# Altium PCB MDBT42Q - Copy (5).PcbDoc
Units mil, origin at the board's own origin, x right, y up, seen from the top; angles counter-clockwise.
Board outline 1100 x 950 mil, 2 copper layers (Top Layer, Bottom Layer); 14 components, 12 nets, 95 pads, 0 vias.
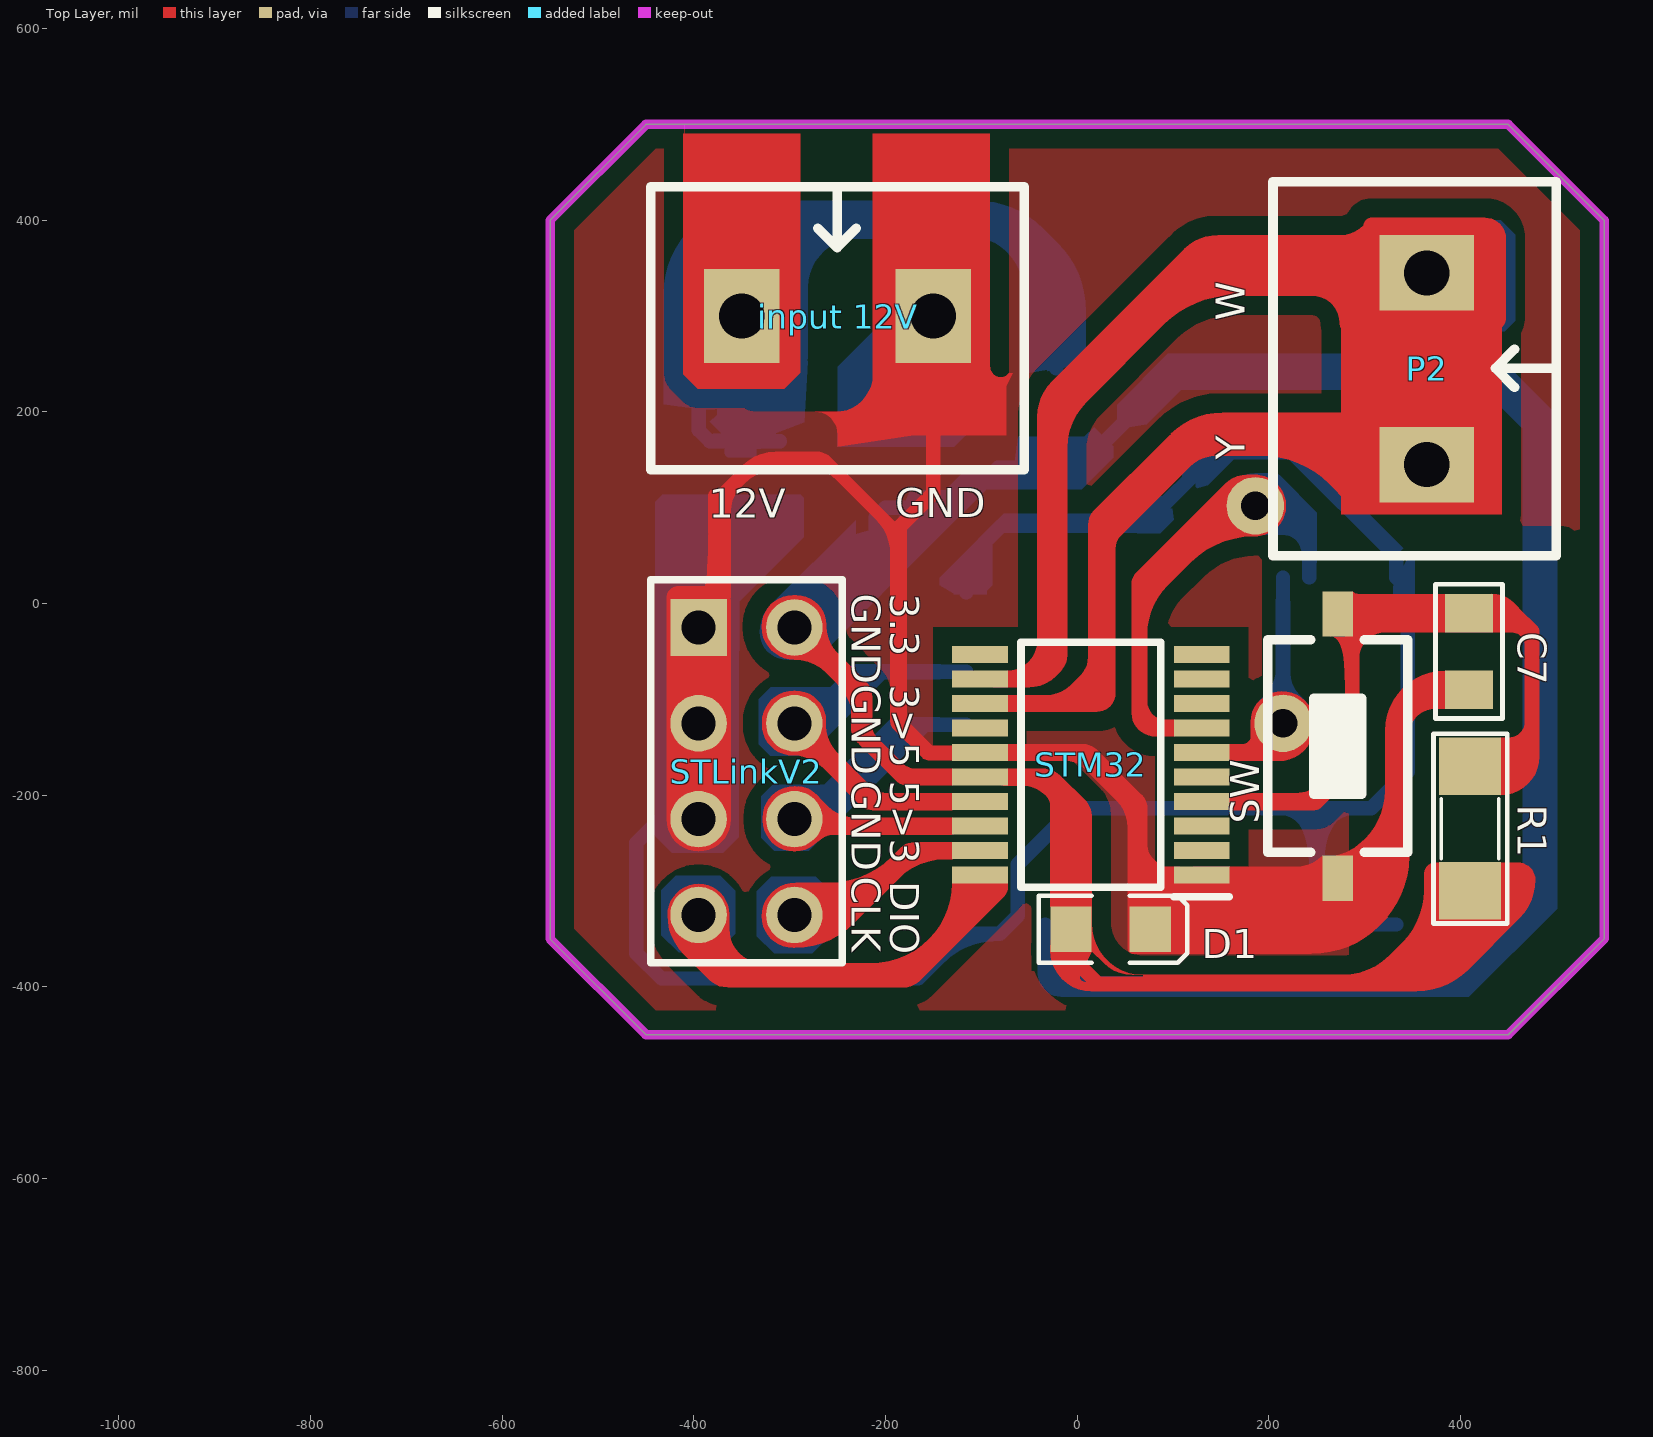
[diagram p0: Top Layer view]
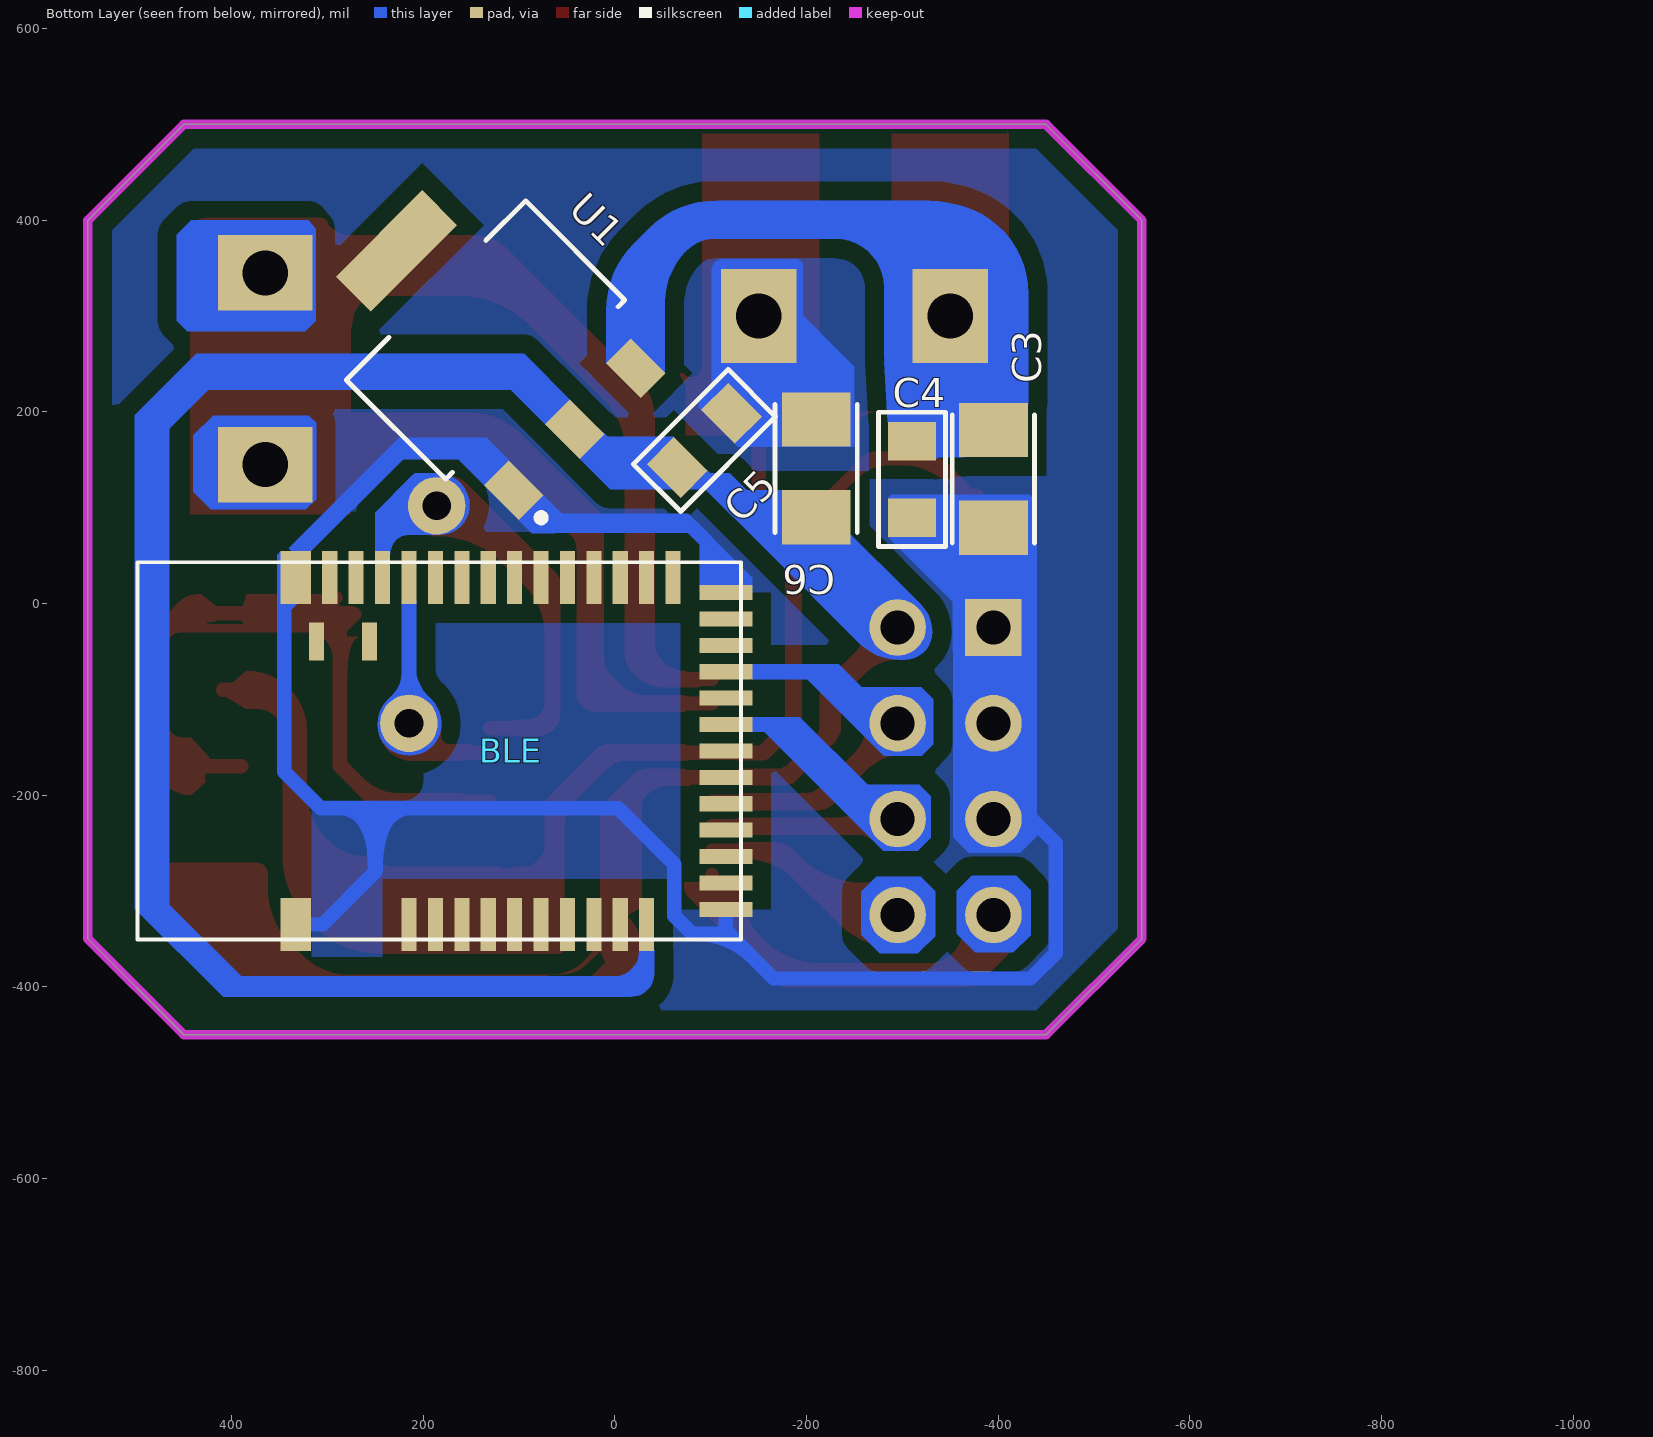
[diagram p1: Bottom Layer view, seen from below]
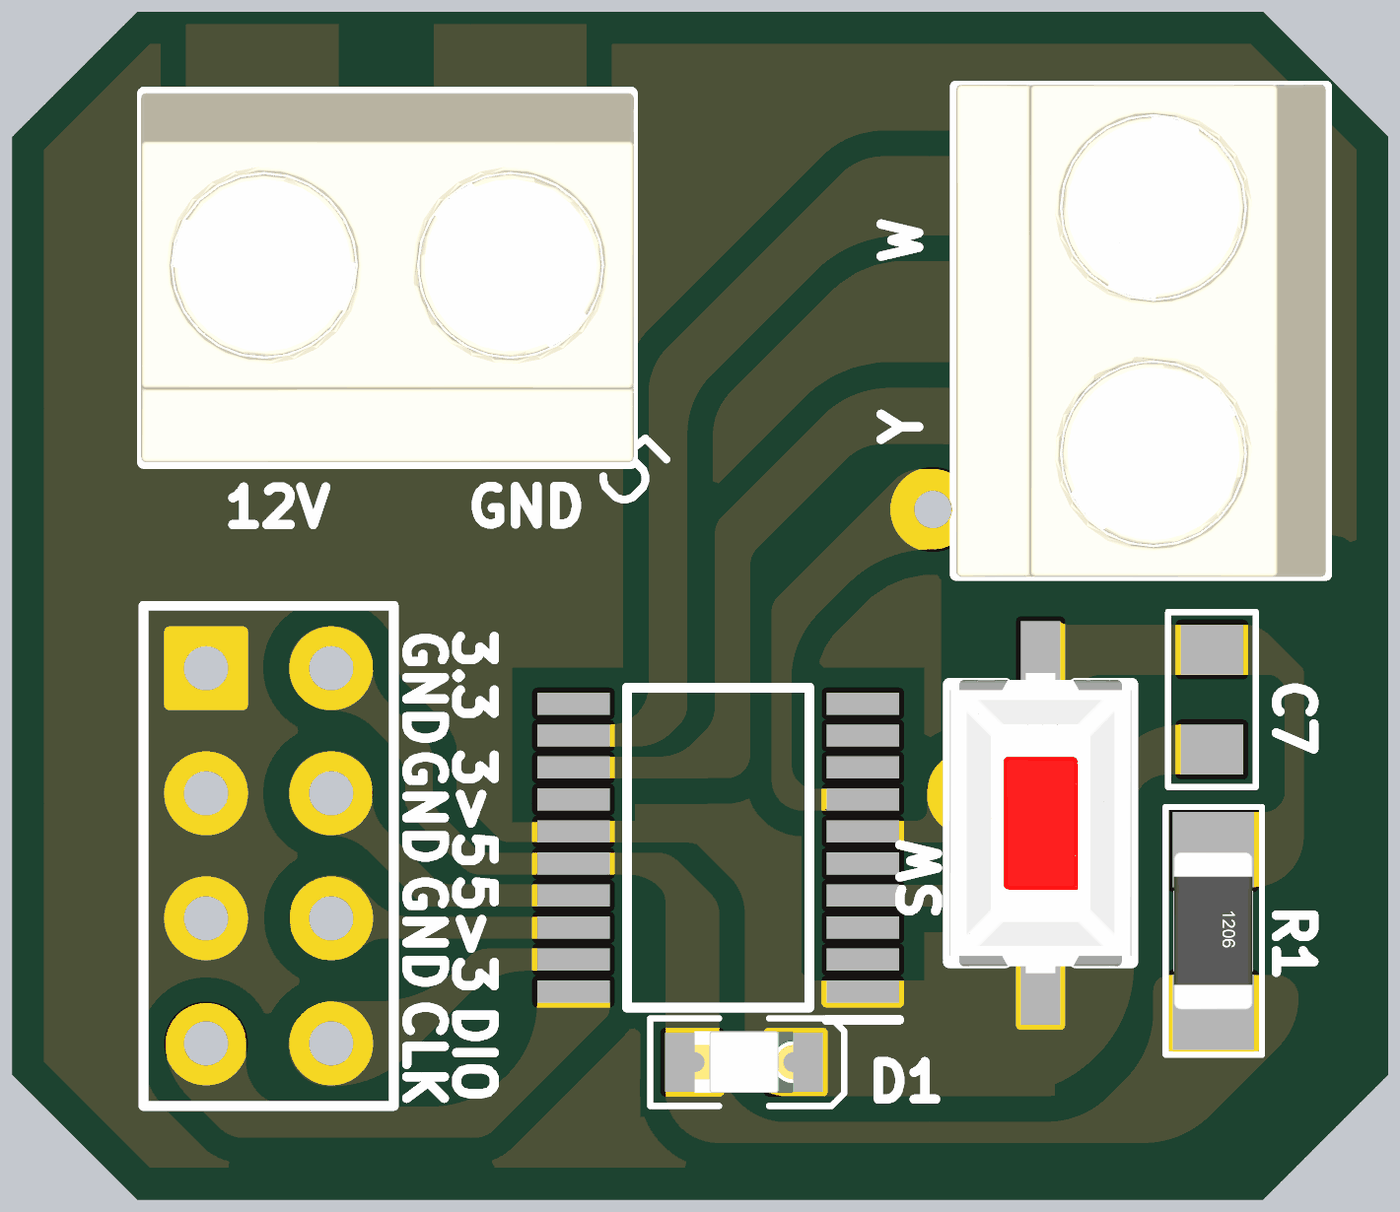
[diagram p2: 3D render of the assembled board from above, using the file's embedded part models]

## Layer stack, top to bottom
Top Solder: solder mask 0.4, Solder Resist, Dk 3.5
Top Layer: signal copper 1.4
Dielectric1: dielectric 12.6, FR-4, Dk 4.8
Bottom Layer: signal copper 1.4
Bottom Solder: solder mask 0.4, Solder Resist, Dk 3.5

## Board outline
-450,-450 -550,-350 -550,400 -450,500 450,500 550,400 550,-350 450,-450

## Design rules (kind name [scope] priority, off if disabled: settings)
Clearance [All] p1: gap=20 ignorepadtopadclearanceinfootprint=FALSE
PlaneClearance [All] p1: clearance=39.37
PlaneConnect [All] p1: planeconnectstyle=Direct reliefexpansion=20 reliefentries=4 reliefconductorwidth=10 reliefairgap=10
PolygonConnect [All] p1: connectstyle=Direct reliefconductorwidth=10 reliefentries=4 polygonreliefangle="90 Angle" airgapwidth=10
RoutingVias [All] p1: holewidth=28 width=50 viastyle="Through Hole" minholewidth=28 minwidth=50 maxholewidth=28 maxwidth=50
SolderMaskExpansion [All] p1: expansion=4
Width [All] p1: maxlimit=35 minlimit=15 preferedwidth=20 minimp=50.000000 maximp=50.000000 favimp=50.000000
28 further rules are at their usual default settings.

## Classes and differential pairs
component class MDBT42Q: C3 C4 C5 C6 C7 C8 D1 "input 12V" P2 R1 STLinkV2 SW U1

## Components (designator, comment, footprint, x,y, rotation, side; value= is the part's Value field where it differs from the comment)
BLE "MODULE_MDBT42Q" PCB_MDBT42Q_10X16 498.35,-153.9 r90 bottom
C3 "C3216X5R1A106K160AB" CAPC3216X180 -395,130 r270 bottom
C4 "2u2" 0805C-GENERIC -310,159.5 r270 bottom
C5 "2u2" 0805C-GENERIC -72.07,149.07 r135 bottom
C6 "C3216X5R1A106K160AB" CAPC3216X180 -210,140.98 r90 bottom
C7 "10u" 0805C-GENERIC 409,-20 r270 top
D1 "LED SMD" LED_0805_Blue 35,-340 r0 top
"input 12V" "Header 2 - M" "Medium - Header 2" -250,300 r0 top
P2 "Header 2 - M" "Medium - Header 2" 365,245 r270 top
R1 "RESISTOR SMD" RES-SM-1206 410,-170 r270 top
STLinkV2 "Header 4X2" HDR2X4 -395,-25 r270 top
STM32 "STM32F070F6P6" SOP65P640X120-20N 14.33,-168.39 r180 top
SW "SW-SMD" SW-SMD 272,-148.8 r270 top
U1 "AMS1117-3.3" SOT229P700X180-4N 135,275 r135 bottom

## Footprints (in the part's own frame and the unit in brackets; to place one, negate y for a bottom-side part, rotate by r counter-clockwise, add the part's x,y. Pads: shape width x height; smd on the part's side, far side on the other; paste and mask are expansions set on the pad)
0805C-GENERIC [mil] "CAPACITOR 0805"
  rect 40x50 smd: 1(-10,0) 2(70,0)
  silkscreen extent -40,-35 100,35, body extent -11,-25 70,25, height 26
CAPC3216X180 [mm]
  rect 1.44x1.82 smd: 1(-1.295,0) 2(1.295,0)
  silkscreen extent -1.7,-1.09 1.7,1.09
HDR2X4 [mm] "Connector; Header; 4x2 Position"
  rect 1.5x1.5 hole 0.9: 1(0,0)
  round 1.5 hole 0.9: 2(0,2.54) 3(2.54,0) 4(2.54,2.54) 5(5.08,0) 6(5.08,2.54) 7(7.62,0) 8(7.62,2.54)
  silkscreen extent -1.27,-1.27 8.89,3.81, body extent -1.27,-1.27 8.89,3.81, height 7
LED_0805_Blue [mm] "Chip LED, 2-Leads, Body 2.0x1.3mm, IPC Medium Density"
  rect 1.1x1.2 smd: 1(-1.05,0) 2(1.05,0)
  silkscreen extent -1.91,-0.89 2.03,0.89, body extent -1,-0.63 1,0.62, height 0.68
"Medium - Header 2" [mm]
  rect 2x2.5 hole 1.2: 1(-2.54,0) 2(2.54,0)
  silkscreen extent -4.95,-4.08 4.95,3.43, body extent -5,-4.07 5,3.43, height 10
PCB_MDBT42Q_10X16 [mm]
  rect 1.4x0.8 smd: 1(-4.6,-4.2) 39(4.6,-4.2)
  rect 1.4x0.4 smd: 2(-4.6,-7.2) 3(-4.6,-7.9) 4(-4.6,-8.6) 5(-4.6,-9.3) 6(-4.6,-10) 7(-4.6,-10.7) 8(-4.6,-11.4) 9(-4.6,-12.1) 10(-4.6,-12.8) 11(-4.6,-13.5) 25(4.6,-14.2) 26(4.6,-13.5) 27(4.6,-12.8) 28(4.6,-12.1) 29(4.6,-11.4) 30(4.6,-10.7) 31(4.6,-10) 32(4.6,-9.3) 33(4.6,-8.6) 34(4.6,-7.9) 35(4.6,-7.2) 36(4.6,-6.5) 37(4.6,-5.8) 38(4.6,-5.1)
  rect 0.4x1.4 smd: 12(-4.2,-15.6) 13(-3.5,-15.6) 14(-2.8,-15.6) 15(-2.1,-15.6) 16(-1.4,-15.6) 17(-0.7,-15.6) 18(0,-15.6) 19(0.7,-15.6) 20(1.4,-15.6) 21(2.1,-15.6) 22(2.8,-15.6) 23(3.5,-15.6) 24(4.2,-15.6)
  rect 1x0.4 smd: 40(2.9,-4.75) 41(2.9,-6.15)
  silkscreen extent -5,-16 5,0
RES-SM-1206 [mil]
  rect 60x65 smd: 1(0,0) 2(130,0)
  silkscreen extent -34,-38 164,39, body extent 2,-31 128,31, height 40
SOP65P640X120-20N [mm]
  rect 1.475x0.45 smd: 1(-2.938,2.925) 2(-2.938,2.275) 3(-2.938,1.625) 4(-2.938,0.975) 5(-2.938,0.325) 6(-2.938,-0.325) 7(-2.938,-0.975) 8(-2.938,-1.625) 9(-2.938,-2.275) 10(-2.938,-2.925) 11(2.938,-2.925) 12(2.938,-2.275) 13(2.938,-1.625) 14(2.938,-0.975) 15(2.938,-0.325) 16(2.938,0.325) 17(2.938,0.975) 18(2.938,1.625) 19(2.938,2.275) 20(2.938,2.925)
  silkscreen extent -3.68,-3.25 1.85,3.5, body extent -2.25,-3.3 2.25,3.3
SOT229P700X180-4N [mm]
  rect 0.93x1.31 smd: 1(-2.29,-3.345) 2(0,-3.345) 3(2.29,-3.345)
  rect 3.24x1.31 smd: 4(0,3.345)
  silkscreen extent -3.36,-4.47 3.36,1.86
SW-SMD [mm] "Switch SMD type"
  rect 1.2x0.8 smd: 1(-3.5,0) 2(3.5,0)
  silkscreen extent -2.82,-1.85 2.82,1.85, body extent -3.05,-1.85 3.05,1.85, height 2.5

## Part data
BLE: "MDBT42Q"
C3 C6: "C Series 1206 10 uF 10 V ±10 % Tolerance X5R SMT Multilayer Ceramic Capacitor"
C4 C5 C7: library part 0805C-2U2-6V3-X5R-PAN, "CAPACITOR 0805 CERAMIC"
D1: "LED"
"input 12V" P2: "Header, 2-Pin, Medium"
R1: "Resistor"
STLinkV2: "Header, 4-Pin, Dual row"
STM32: "STMICROELECTRONICS - STM32F070F6P6 - MCU, 32BIT, CORTEX-M0, 48MHZ, TSSOP-20"
SW: "Switch"
U1: "Sot223/Pkg 1-Amp 3.3-Volt Low Drop Out Voltage Regulatator"

## Free pads (board coordinates)
  round 60 hole 30: 2(215,-125) 3(186,102)

## Nets (pads, with @x,y where several pads share a name; then routed paths per layer and width w, separated by ;. In a path a pad name is that pad's centre, name@x,y a point inside that pad or via, vN(x,y) a via of type N, cw(c..) or ccw(c..) an arc to the next point about the centre after c; other vN are vias at no path point)
32>52: BLE.21 STLinkV2.4 STM32.17 | length 429
  Top Layer w15: STLinkV2.4 -213.23,-206.77 STM32.17
  Bottom Layer w15: STLinkV2.4 -267.18,-125 -213.41,-71.22 BLE.21
52>32: BLE.19 STLinkV2.6 STM32.18 | length 416.8
  Top Layer w15: STLinkV2.6 -287.64,-232.36 STM32.18
  Bottom Layer w15: STLinkV2.6 -265,-225 -166.34,-126.34 BLE.19
+3.3V: BLE.11 C5.1 C6.1 D1.1 R1.2 STLinkV2.2 STM32.16 U1.2 | length 3041.5
  Top Layer w15: STLinkV2.2 -228.44,-91.56 -228.44,-131.56 -178.82,-181.18 STM32.16 -38.82,-181.18 -6.34,-213.66 D1.1 -6.34,-368.66 22,-397 313,-397 R1.2
  Bottom Layer w15: STLinkV2.2 -210,60 C6.1 -200,100 -124.55,100 -82.55,142 C5.1 2,142 U1.2 100,240 430,240 480,190 480,-312.56 395.56,-397 -20,-397 -33.14,-383.86 BLE.11
+12V: "input 12V.1" C3.1 C4.1 U1.3 | length 717.3
  Bottom Layer w15: C4.1 -383.52,169.5 C3.1 -395,255 -350,300 -250,400 -80,400 -21.87,341.87 U1.3
CLK: STLinkV2.7 STM32.20 | length 406.5
  Top Layer w15: STLinkV2.7 -395,-365 -368.72,-391.28 -179.5,-391.28 -101.34,-313.12 STM32.20
DIO: STLinkV2.8 STM32.19 | length 221.4
  Top Layer w15: STLinkV2.8 -238,-325 -170.95,-257.95 STM32.19
GND: "input 12V.2" BLE.1 BLE.12 BLE.24 BLE.39 C3.2 C4.2 C5.2 C6.2 C7.2 D1.2 STLinkV2.1 STLinkV2.3 STLinkV2.5 STM32.1 STM32.15 SW.2 U1.1 | length 4240.3
  Top Layer w15: STLinkV2.5 STLinkV2.3 STLinkV2.1 -377.68,-7.68 -377.68,70 ; -377.68,75 -377.68,112.32 ; -150,300 -150,115 -185,80 -185,-125 -154.41,-155.59 STM32.15 5.59,-155.59 65.33,-215.33 65.33,-264.54 84.34,-283.54 STM32.1 ; D1.2 130,-286.34 STM32.1 ; SW.2@272,-290.32 333,-229.32 333,-122 365,-90 C7.2 ; SW.2 268.95,-283.54 STM32.1
  Bottom Layer w15: STLinkV2.5 -435,-225 -460,-250 -460,-364.97 -433.69,-391.28 -165.57,-391.28 -119,-344.71 ; STLinkV2.1 C3.2 -384.52,89.5 C4.2 ; -150,300 -210,240 C6.2 -128.17,191.97 C5.2 ; BLE.12 -115.82,-341.53 -119,-344.71 ; BLE.24 -115.82,44.18 -79,81 68.5,81 145.5,158 224,158 333,49 BLE.39 345,15.2 345,-175.57 307.02,-213.54 250,-213.54 ; BLE.1 305,-335 250,-280 250,-213.54 ; -119,-344.71 -80.71,-344.71 -62,-326 -62,-272 -3.54,-213.54 250,-213.54
MD_RESET: BLE.35 pad.2 STM32.6 | length 249.9
  Top Layer w15: STM32.6 184.41,-155.59 pad.2
  Bottom Layer w15: BLE.35 214.89,-124.89 pad.2
NetC7_1: C7.1 R1.1 STM32.4 SW.1 | length 763.7
  Top Layer w15: STM32.4 250.23,-206.77 287,-170 287,-26 SW.1 ; SW.1@275,-10 C7.1 456,-10 475,-29 475,-157 462,-170 R1.1 R1.1@390,-170
PWM_WHITE: P2.1 STM32.12 | length 793.6
  Top Layer w15: STM32.12 -48.82,-78.82 -30,-60 -30,199 116,345 P2.1
PWM_YELLOW: P2.2 STM32.13 | length 682.7
  Top Layer w15: STM32.13 -14.41,-104.41 20,-70 20,82 112,174 336,174 P2.2
SWDCLK: BLE.36 pad.3 STM32.7 | length 478.6
  Top Layer w15: STM32.7 80,-130 64.4,-114.4 64.4,19.41 147,102 pad.3
  Bottom Layer w15: pad.3 218,102 242.45,77.55 BLE.36
pads on no net: BLE.2 BLE.3 BLE.4 BLE.5 BLE.6 BLE.7 BLE.8 BLE.9 BLE.10 BLE.13 BLE.14 BLE.15 BLE.16 BLE.17 BLE.18 BLE.20 BLE.22 BLE.23 BLE.25 BLE.26 BLE.27 BLE.28 BLE.29 BLE.30 BLE.31 BLE.32 BLE.33 BLE.34 BLE.37 BLE.38 BLE.40 BLE.41 STM32.2 STM32.3 STM32.5 STM32.8 STM32.9 STM32.10 STM32.11 STM32.14 U1.4

## Polygon pours and split planes (outlines as drawn)
GND on Top Layer "NONET_L-01_P-001" (solid, pour order 13): -450,500 450,500 550,400 550,-350 450,-450 -450,-450 -550,-350 -550,400
no net on Top Layer "NONET_L-01_P-001" (solid, pour order 15): 316.03,322.5
no net on Top Layer "NONET_L01_P011" (solid, pour order 11): 390.32,692.54
GND on Top Layer "GND_L01_P001" (solid, pour order 1): -126.99,625.49
GND on Bottom Layer "NONET_L-01_P-001" (solid, pour order 17): -450,500 450,500 550,400 550,-350 450,-450 -450,-450 -550,-350 -550,400

## Keep-outs
Keep-Out Layer:
  lines w10: -550,-350 -550,400 -450,500 -350,500 450,500 550,400 550,-350 450,-450 -450,-450 -550,-350

## Other copper
Top Layer:
  rectangle net GND: -202.48,175.23 -73.49,236.21
  rectangle net PWM_WHITE: 275.19,92.69 443.24,352.58
  region net GND: -213,239 cw(c-252,239) -252,200 -273,200 cw(c-273,176.76) -249.76,176.76 -249.76,163.41 -94.35,186.9 -67.11,240.48 -70.61,240.85 -72.96,238.5 cw(c-79,244.54) -79,236 cw(c-79,248) -91,248 -91,300 ccw(c-97,300) -97,306 -114,306 cw(c-114,302) -110,302 -110,209.63 ccw(c-97.88,209.63) -97.88,197.51
  region: -304.48,370.4 -391.57,370.4 ccw(c-391.57,355.04) -406.93,355.04 ccw(c-370.12,355.04) -370.12,318.23 -326.38,318.23 ccw(c-326.38,324.88) -319.73,324.88 cw(c-308.42,324.88) -308.42,336.19 -302.55,336.19
  region: -339.75,370.4 -308.17,370.4 cw(c-308.17,351.85) -289.62,351.85 -289.62,250.09 cw(c-308.17,250.09) -308.17,231.54 -389.88,231.54 cw(c-389.88,248.58) -406.93,248.58 -406.93,351.35 cw(c-388.38,351.35) -388.38,369.9 -366.82,369.9 cw(c-366.82,332.3) -329.23,332.3 -329.23,350.85 cw(c-312.69,350.85) -312.69,367.38
  region net GND: -361.55,5.99 -361.55,97.08 cw(c-328.64,97.08) -351.91,120.35 -348.27,123.99 cw(c-298.75,74.47) -298.75,144.5 -288.86,144.5 cw(c-288.86,90.37) -250.59,128.65 -210.48,88.54 cw(c-248.53,50.5) -194.72,50.5 -194.72,-123.35 ccw(c-184.07,-123.35) -191.6,-130.88 -161.78,-160.7 ccw(c-154.43,-153.35) -154.43,-163.74 -128.12,-163.74 ccw(c-128.12,-158.4) -124.34,-162.18 ccw(c-141.01,-178.85) -141.01,-155.27 -141.98,-155.27 cw(c-141.98,-126.47) -162.35,-146.83 -180.2,-128.99 cw(c-168.61,-117.4) -185,-117.4 -185,80 -257.54,152.54 ccw(c-271.67,138.42) -271.67,158.4 -314.91,158.4 ccw(c-314.91,109.99) -349.14,144.22 -372.09,121.27 ccw(c-360.28,109.46) -376.98,109.46 -376.98,3.99 cw(c-387.01,3.99) -379.92,-3.11
  region net +3.3V: 15.41,-362.74 28.15,-375.48 ccw(c57.42,-346.22) 57.42,-387.61 277.38,-387.61 ccw(c277.38,-319.22) 325.73,-367.58 339.75,-353.56 ccw(c285.83,-299.64) 362.08,-299.64 362.08,-282.65 cw(c374.31,-282.65) 374.31,-270.43 460.24,-270.43 cw(c460.24,-288.43) 478.24,-288.43 cw(c421.71,-288.43) 461.68,-328.4 407.59,-382.5 cw(c354.29,-329.2) 354.29,-404.58 14.49,-404.58 cw(c14.49,-362.11) -27.98,-362.11 -27.98,-359.67 cw(c15.19,-359.67) 15.19,-316.5 15.19,-333.68 ccw(c69.56,-333.68) 69.56,-388.04 68.98,-388.04 cw(c68.01,-396.03) 68.01,-395.06 8.27,-395.06 cw(c8.27,-389.4) 2.61,-389.4
  region net NetC7_1: 158.92,-215.51 247.88,-215.51 ccw(c247.88,-205.81) 254.74,-212.67 251.2,-209.13 cw(c253.56,-206.77) 250.23,-206.77 156.39,-206.77 ccw(c156.39,-220.08) 146.98,-210.67
  region net NetC7_1: 158.92,-198.03 225.13,-198.03 ccw(c225.13,-145.22) 262.47,-182.56 279.07,-165.97 ccw(c270.22,-157.12) 282.73,-157.12 282.73,-168.35 ccw(c289.17,-168.35) 284.62,-172.9 254.79,-202.73 cw(c244.33,-192.28) 244.33,-207.07 156.94,-207.07 ccw(c156.94,-220.74) 147.27,-211.07
  region net NetC7_1: 384.12,-30.21 321.36,-30.21 ccw(c321.36,-57.62) 293.95,-57.62 ccw(c289.63,-57.62) 289.63,-53.29 283.26,-53.29 cw(c283.26,-50.49) 280.46,-50.49 280.46,-16.89 cw(c289.36,-16.89) 289.36,-7.99 386.61,-7.99 cw(c386.61,-12.57) 391.18,-12.57
  region net NetC7_1: 384.12,9.88 293.96,9.88 cw(c293.96,18.83) 287.63,12.5 287.35,12.22 ccw(c295.67,3.9) 283.9,3.9 ccw(c323.74,43.74) 323.74,-12.61 383.63,-12.61 ccw(c383.63,-7.27) 387.41,-11.04 389.96,-8.49
  region net NetC7_1: 433,9.99 cw(c433,-22.73) 456.14,0.4 460.87,-4.34 458.6,-6.61 ccw(c470.95,-18.96) 453.48,-18.96 420.15,-18.96 cw(c420.15,-13.18) 416.06,-17.27 ccw(c404.17,-29.17) 404.17,-12.34 403.9,-12.34
  region net NetC7_1: 441.93,-200.03 ccw(c441.93,-159.61) 482.35,-159.61 482.35,-157.85 cw(c478.18,-157.85) 478.18,-162.01 438.54,-162.01 ccw(c438.54,-172.59) 427.96,-172.59 427.96,-183.79 cw(c426.33,-183.79) 426.33,-185.43
  region net NetC7_1: 442.23,-140.01 450.45,-140.01 ccw(c450.45,-123.19) 467.27,-123.19 467.27,-43.91 ccw(c453.56,-43.91) 453.56,-30.21 384.12,-30.21 384.12,-24.21 cw(c386.58,-24.21) 386.58,-21.75 421.18,-21.75 ccw(c421.18,-13.9) 429.04,-13.9 cw(c432.94,-13.9) 432.94,-10 456,-10 cw(c456,-27.61) 473.61,-27.61 473.61,-155.61 ccw(c475,-155.61) 475,-157 cw(c464.61,-157) 464.61,-167.39 430.02,-167.39 cw(c430.02,-160.54) 423.18,-160.54
  region net +3.3V: -264.64,-33.25 -264.95,-48.45 -274.71,-48.45 cw(c-274.71,-37.3) -282.59,-45.18 -281.45,-44.04 ccw(c-291.03,-34.46) -277.48,-34.46
  region net +3.3V: -228.63,-145.24 cw(c-211.03,-127.64) -235.92,-127.64 -235.92,-115.04 cw(c-220.71,-115.04) -231.47,-104.28 -222.03,-94.85 cw(c-235.31,-108.12) -216.53,-108.12 -216.53,-133.68 cw(c-217.9,-133.68) -216.93,-134.64
  region net +3.3V: -237,-104.85 cw(c-241.28,-109.13) -235.23,-109.13 -235.23,-126.4 ccw(c-205.67,-126.4) -226.57,-147.29 -223.91,-144.63 -223.62,-144.63 -223.62,-130.74 ccw(c-232.53,-130.74) -226.23,-124.44 -221.88,-128.79 ccw(c-216.93,-123.84) -216.93,-130.84 -216.93,-129.32 ccw(c-225.81,-129.32) -219.53,-123.05 cw(c-216.46,-119.97) -220.8,-119.97 -220.8,-99.67 ccw(c-220.8,-97.84) -219.52,-99.13 -219.03,-98.65 cw(c-220.72,-96.96) -220.72,-99.35 -229.23,-99.35
  region net +3.3V: -213.87,-97.68 ccw(c-237.8,-97.68) -220.88,-80.75 -250.65,-50.98 cw(c-224,-24.34) -261.68,-24.34 ccw(c-261.68,-38.6) -271.77,-28.52 -272.24,-28.99 cw(c-306.66,-63.41) -257.98,-63.41 -257.98,-64.95 cw(c-257.98,-67.29) -256.33,-65.63 -220.43,-101.53
  region net +3.3V: -252.47,-81.63 -251.46,-82.64 cw(c-299.6,-130.78) -231.52,-130.78 cw(c-231.52,-133.2) -229.8,-131.49 -227.06,-134.24 ccw(c-232.17,-129.12) -224.94,-129.12 -224.94,-112.66 ccw(c-262.99,-112.66) -236.09,-85.75 -240.58,-81.25 ccw(c-255.58,-96.25) -255.58,-75.04
  region net SWDCLK: 188.6,70.17 184.54,70.17 ccw(c184.54,-23.17) 118.53,42.83 94.55,18.85 ccw(c146.68,-33.29) 72.95,-33.29 cw(c90.31,-15.93) 65.76,-15.93 65.76,12.51 cw(c77.03,12.51) 69.06,20.48 132.51,83.92 cw(c138.67,77.75) 138.67,86.48 177.89,86.48
  region net SWDCLK: 101.53,-138.79 81.67,-138.79 cw(c81.67,-114.16) 57.04,-114.16 cw(c59.1,-114.16) 59.1,-112.1 66.75,-112.1
  region net GND: 106.68,-274.72 92.83,-274.72 cw(c92.83,-262.42) 84.13,-271.12 78.53,-265.52 cw(c90.86,-253.19) 73.42,-253.19 73.42,-214.36 ccw(c52.58,-214.36) 67.32,-199.62 ccw(c69.25,-201.55) 66.52,-201.55 66.52,-261.1 ccw(c75.88,-261.1) 69.26,-267.72 80.74,-279.2 ccw(c91.67,-268.27) 91.67,-283.73 107.58,-283.73 ccw(c107.58,-278.83) 111.04,-282.29
  region net GND: -72.42,-146.85 6.81,-146.85 cw(c6.81,-165.54) 20.02,-152.33 65.62,-197.92 cw(c48.34,-215.19) 72.77,-215.19 72.66,-215.19 70.26,-217.59 16.12,-163.44 ccw(c-6.49,-186.06) -6.49,-154.08 -67.68,-154.08 cw(c-67.68,-138.98) -78.35,-149.66
  region net GND: -72.42,-164.33 -11.64,-164.33 cw(c-11.64,-191.9) 7.86,-172.4 41.38,-205.93 cw(c13.38,-233.92) 52.98,-233.92 52.98,-359.93 ccw(c58.64,-359.93) 58.64,-365.59 244.52,-365.59 ccw(c244.52,-265.59) 315.23,-336.3 324.23,-327.3 cw(c323.23,-326.3) 323.23,-327.72 86.04,-327.72 cw(c86.04,-295.89) 63.53,-318.4 ccw(c52.88,-307.75) 67.94,-307.75 67.94,-228.12 ccw(c51.94,-228.12) 63.26,-216.8 3.38,-156.93 ccw(c0.16,-160.15) 0.16,-155.59 -85.99,-155.59
  region net GND: 54.64,-316.38 54.64,-232.68 ccw(c13.81,-232.68) 42.68,-203.81 10.69,-171.82 ccw(c-9.57,-192.08) -9.57,-163.43 -76.64,-163.43 cw(c-76.64,-143.43) -90.78,-157.57 cw(c-85.99,-162.36) -85.99,-155.59 5.59,-155.59 cw(c5.59,-157) 6.59,-156 60.25,-209.66 cw(c49.09,-220.82) 64.87,-220.82 64.87,-259.75 ccw(c75.32,-259.75) 67.93,-267.14 84.34,-283.54 ccw(c86.41,-281.47) 86.41,-284.4 120.5,-284.4 120.5,-291.72 cw(c101.72,-291.72) 115,-305 105.17,-314.83 cw(c88.61,-298.27) 88.61,-321.69 68.73,-321.69 ccw(c68.73,-334.35) 59.78,-325.4
  region net +3.3V: -130.26,-172.44 -169.04,-172.44 cw(c-169.04,-155.11) -181.29,-167.37 -208.91,-139.75 cw(c-196.95,-127.79) -213.87,-127.79 -213.87,-98.91 ccw(c-226.39,-98.91) -217.53,-90.06 -249.06,-58.53 cw(c-218.57,-28.05) -261.68,-28.05 -266.57,-28.05 ccw(c-266.57,-30.13) -268.04,-28.66 cw(c-270.39,-31.01) -267.07,-31.01 -267.07,-48.44 ccw(c-258.98,-48.44) -264.7,-54.16 -223.22,-95.63 cw(c-230.06,-102.47) -220.39,-102.47 -220.39,-134.12 ccw(c-216.85,-134.12) -219.35,-136.62 -179.23,-176.74 ccw(c-177.82,-175.33) -177.82,-177.33 -115.68,-177.33
  region net +3.3V: -130.26,-189.92 -176.44,-189.92 cw(c-176.44,-171.8) -189.25,-184.61 -225.06,-148.8 cw(c-209.73,-133.47) -231.41,-133.47 -231.41,-113.67 ccw(c-258.65,-113.67) -239.39,-94.41 -261.06,-72.75 ccw(c-295.22,-106.91) -295.22,-58.59 cw(c-295.22,-24.84) -328.98,-24.84 -328.98,-23.61 cw(c-296.87,-23.61) -296.87,8.5 -292.57,8.5 cw(c-292.57,-22.39) -261.68,-22.39 -261.68,-26.28 cw(c-279.48,-26.28) -279.48,-44.08 -282.75,-44.08 -223.22,-95.63 -220.77,-135.32 -178.82,-181.18 -133.82,-179.71
  region net 32>52: -130.26,-197.89 -198.13,-197.89 cw(c-198.13,-174.67) -214.55,-191.09 -251.19,-154.45 cw(c-224.8,-128.06) -262.13,-128.06 -270.71,-128.06 cw(c-270.71,-117.23) -278.38,-124.89 -278.19,-125.07 -278.19,-149.28 -248.43,-179.04 ccw(c-177.72,-108.33) -177.72,-208.33 -124.69,-208.33
  region net 32>52: -130.28,-215.55 -213.91,-215.55 cw(c-213.91,-198.21) -226.18,-210.47 -265.06,-171.59 ccw(c-296.59,-203.11) -296.59,-158.53 cw(c-296.59,-126.37) -328.75,-126.37 -328.75,-123.9 cw(c-295.77,-123.9) -295.77,-90.92 -293.95,-90.92 cw(c-293.95,-122.74) -262.13,-122.74 -262.13,-126.37 cw(c-279.1,-126.37) -279.1,-143.35 cw(c-279.1,-160.49) -261.96,-160.49 -261.96,-160.84 -222.05,-205.51 -115.82,-209.02
  region net GND: -395.38,-258.49 -394.78,-258.49 ccw(c-394.78,-225.26) -361.55,-225.26 -361.55,2.99 ccw(c-376.63,2.99) -376.63,18.07 -415.96,18.07 ccw(c-415.96,5.74) -428.29,5.74 -428.29,-225.32 ccw(c-395.12,-225.32) -395.12,-258.48
  region net 52>32: -130.26,-223.62 -230.83,-223.62 cw(c-230.83,-181.54) -260.58,-211.3 -274.24,-197.64 ccw(c-290.48,-213.88) -290.48,-190.91 -290.48,-204.45 ccw(c-284.45,-204.45) -288.72,-208.72 -266.82,-230.61 -266.82,-231.13 -116.77,-231.13 ccw(c-116.77,-220.96) -109.57,-228.15
  region net 52>32: -130.26,-241.1 -251.87,-241.1 ccw(c-251.87,-268.94) -271.55,-249.25 cw(c-293.55,-227.26) -293.55,-258.37 -296.09,-258.37 cw(c-296.09,-226.49) -327.97,-226.49 -327.97,-223.45 cw(c-295.21,-223.45) -295.21,-190.69 -294.34,-190.69 cw(c-294.34,-224.1) -260.93,-224.1 -260.93,-227.12 ccw(c-256.15,-227.12) -256.15,-231.9 -106.25,-231.9
  region net DIO: -129.83,-266.92 -137.95,-266.92 ccw(c-137.95,-335.95) -186.76,-287.14 -197.64,-276.26 ccw(c-197.64,-252.66) -181.33,-268.97 -168.58,-256.22 ccw(c-164.76,-252.4) -164.76,-257.8 -126.91,-257.8
  region net DIO: -130.26,-249.21 -169.93,-249.21 ccw(c-169.93,-269.49) -184.26,-255.15 -193.85,-264.74 cw(c-257.83,-200.76) -257.83,-291.24 -293.69,-291.24 ccw(c-293.69,-326.63) -329.08,-326.63 ccw(c-296.46,-326.63) -296.46,-359.25 -294.51,-359.25 ccw(c-294.51,-272.37) -233.07,-333.8 -177.92,-278.66 cw(c-137.49,-319.09) -137.49,-261.91 ccw(c-130.26,-258.83) -124.7,-264.39 -115.56,-255.25
  region net CLK: -130.37,-292.09 cw(c-212.39,-292.1) -154.4,-350.1 cw(c-215.95,-288.56) -215.95,-375.6 -327.05,-375.6 cw(c-327.05,-339.57) -363.08,-339.57 -363.08,-324.35 ccw(c-394.8,-324.35) -394.8,-292.63 ccw(c-394.8,-325.18) -427.35,-325.18 ccw(c-369.23,-325.19) -410.33,-366.28 -384.11,-392.51 ccw(c-364.78,-373.17) -364.78,-400.51 -180.73,-400.51 ccw(c-180.73,-377.31) -164.32,-393.72 -76.09,-305.49 ccw(c-85.19,-296.34) -72.28,-296.34 -72.28,-292.36 ccw(c-74.5,-292.36) -72.93,-290.79 -73.31,-290.42
  region net +3.3V: -27.87,-316.5 -27.87,-211.52 ccw(c-43.67,-211.52) -32.5,-200.35 ccw(c-57.54,-225.39) -57.54,-189.98 -58.28,-189.98 cw(c-56.74,-189.98) -57.83,-188.89 -52.62,-183.69 ccw(c-36.28,-167.34) -36.28,-190.46 -31.02,-190.46 cw(c-31.02,-201.72) -23.05,-193.76 -16.21,-200.6 cw(c-25.59,-209.97) -12.33,-209.97 -12.33,-326.14
  region net +3.3V: 15.19,-316.5 15.19,-221.18 ccw(c-6.29,-221.18) 8.9,-205.99 -17.57,-179.52 ccw(c-34.65,-196.6) -34.65,-172.44 cw(c-41.91,-172.44) -36.78,-177.58 -39.93,-180.74 -20.1,-200.58 cw(c-21.41,-201.89) -19.55,-201.89 -19.55,-292.42 ccw(c32.96,-292.42) -4.17,-329.56
  region net +3.3V: -72.42,-172.44 -35.58,-172.44 cw(c-35.58,-191.28) -22.26,-177.96 8.12,-208.34 cw(c-1.23,-217.68) 11.99,-217.68 11.99,-333.04 cw(c-3.45,-333.04) 7.47,-343.96 -20.21,-316.28 cw(c-15.28,-311.35) -22.26,-311.35 -22.26,-214.94 ccw(c-60.85,-214.94) -33.56,-187.65 cw(c-39.18,-182.04) -39.18,-189.98 -77.38,-189.98 cw(c-77.38,-187.21) -79.34,-189.17 -83.11,-185.39
  region net GND: 256.37,-263.09 cw(c228.33,-235.04) 228.33,-274.71 143.95,-274.71 ccw(c143.95,-280.31) 139.99,-276.35 76.34,-340 96.44,-360.1 cw(c92.99,-363.56) 97.87,-363.56 246.56,-363.56 ccw(c246.56,-263.56) 346.56,-263.56 346.56,-224.23 ccw(c321.38,-224.23) 321.38,-199.05 321.38,-199.09 cw(c256.15,-199.09) 256.15,-264.32
  region net GND: 385.14,-110 373.11,-110 ccw(c373.11,-136.55) 346.56,-136.55 346.56,-251.56 cw(c287.77,-251.56) 287.77,-310.35 278.08,-310.35 cw(c278.08,-308.23) 275.95,-308.22 275.95,-288.18 cw(c285.64,-288.18) 278.79,-281.33 ccw(c228.97,-184.44) 325.86,-134.63 334.78,-117.41 365,-90 408.71,-95.71
  region net GND: 384.41,-70.05 ccw(c384.41,-132.9) 321.55,-132.9 321.55,-195.6 cw(c251.08,-195.6) 300.91,-245.42 cw(c230.26,-174.78) 230.26,-274.69 121.14,-274.69 ccw(c125.66,-294.98) 139.61,-279.56 268.76,-279.56 ccw(c268.76,-240.97) 296.05,-268.26 330.01,-234.3 334.37,-117.41 346.85,-104.93 370.91,-91.25 403.29,-91.03 402.89,-85.85
  region net NetC7_1: 434.01,-11.08 437.88,-19.74 ccw(c440.22,-22.08) 437.88,-24.43 433.89,-24.43 ccw(c433.89,-26.7) 431.61,-26.7 431.61,-24.15 ccw(c427.95,-24.15) 427.95,-20.49 ccw(c428.13,-15.41) 433.21,-15.6
  region net MD_RESET: 158.92,-164.33 210.42,-164.33 ccw(c210.42,-127.11) 247.63,-127.11 247.63,-125.36 ccw(c213.7,-125.36) 213.7,-91.43 ccw(c213.7,-123.65) 181.48,-123.65 181.48,-137.82 cw(c172.37,-137.82) 172.37,-146.94 151.68,-146.94 ccw(c151.68,-153.58) 145.04,-153.58 ccw(c149.53,-153.58) 149.53,-158.07 149.96,-158.07
  region net SWDCLK: 188.78,134.42 177.28,134.42 ccw(c177.28,102.15) 154.47,124.97 62.32,32.82 ccw(c75.36,19.77) 56.91,19.77 57.41,19.77 59.45,17.72 63.17,21.44 cw(c77.09,7.51) 77.09,27.2 160.33,95.58 177.49,88.76 196.98,106.5
  region net SWDCLK: 101.34,-121.31 91.95,-121.31 cw(c91.95,-102.48) 73.13,-102.48 73.13,-1.13 cw(c104.41,-1.13) 82.29,20.98 125.78,64.47 cw(c139.49,50.76) 139.49,70.15 186.15,70.15 ccw(c186.15,102) 218,102 ccw(c185.58,102) 185.58,134.42 185.01,134.42 ccw(c185.01,102.28) 152.88,102.28 152.88,97.68 cw(c126.1,97.68) 126.1,70.89 64.4,19.41 61.11,-92.45 72.07,-125.3 105.66,-131.4 119.78,-126.29
  region net PWM_YELLOW: 425.69,180.52 425.69,187.19 ccw(c413.62,187.19) 413.62,199.26 151.7,199.26 ccw(c151.7,123.02) 97.79,176.93 102.54,172.18 cw(c98.05,167.69) 104.4,167.69 264.04,167.69 cw(c264.04,134.88) 287.23,158.08 cw(c313.11,132.2) 313.11,168.8 394.17,168.8
  region net PWM_YELLOW: 313.31,185.5 419.47,185.5 cw(c419.47,179.28) 425.69,179.28 425.69,105.31 cw(c417.19,105.31) 417.19,96.81 304.04,96.81 cw(c304.04,127.88) 282.07,105.91 ccw(c263.95,124.03) 289.57,124.03 289.57,137.77 313.67,137.77 ccw(c313.67,164.38) 332.49,145.57 ccw(c314.67,127.75) 314.67,152.95 282.2,152.95
  region net PWM_YELLOW: 314.86,105.91 282.07,105.91 263.03,124.96 ccw(c192.32,54.25) 192.32,154.25 145.59,154.25 ccw(c145.59,113.94) 117.09,142.44 45.51,70.87 ccw(c58.95,57.43) 39.95,57.43 39.95,-94.01 cw(c21.06,-94.01) 21.06,-112.9 -6.16,-112.9 cw(c-6.16,-109.27) -9.79,-109.27 22.64,-69.97 20,82 123.37,167.15 287.13,165.9 305.05,126.38
  region net PWM_YELLOW: 1.96,-113.15 ccw(c1.96,-81.31) 33.8,-81.31 33.8,-69.23 cw(c33.06,-69.23) 33.06,-69.97 24.25,-69.97 ccw(c24.25,-86.16) 8.06,-86.16 8.06,-94.51
  region net PWM_WHITE: -50.71,-87.6 ccw(c-50.71,-47.52) -22.37,-75.86 -17.05,-70.54 ccw(c-33.42,-54.17) -10.27,-54.17 -10.27,162.6 cw(c56.81,162.6) 9.38,210.03 91.23,291.88 cw(c161.94,221.17) 161.94,321.17 245.74,321.17 cw(c245.74,292.96) 273.96,292.96 ccw(c284.94,292.96) 284.94,281.97 429.8,281.97 ccw(c429.8,299.66) 447.49,299.66 447.49,380.93 ccw(c425.98,380.93) 425.98,402.44 306.95,402.44 ccw(c306.95,394.79) 299.3,394.79 cw(c272.76,421.33) 272.76,383.8 212.89,383.8 ccw(c212.89,311.98) 162.11,362.76 156.17,356.82 cw(c90.88,422.1) 90.88,329.78 cw(c77.03,329.78) 86.83,319.98 -18.59,214.57 ccw(c18.37,177.62) -33.89,177.62 -33.89,-46.92 cw(c-65.05,-46.92) -43.02,-68.95 -47.74,-73.67
  region net PWM_YELLOW: -72.42,-113.15 1.96,-113.15 ccw(c1.96,-92.84) 16.32,-107.2 19.97,-103.55 ccw(c-13.41,-70.17) 33.8,-70.17 33.8,-70.51 cw(c-29.9,-30.14) -29.9,-103.73 -84.22,-103.73 ccw(c-84.22,-106.43) -86.13,-104.52
  region net PWM_YELLOW: -72.42,-95.67 -32.46,-95.67 ccw(c-32.46,-58.28) -6.02,-84.72 3.64,-75.06 ccw(c-15.88,-55.54) 11.72,-55.54 11.72,82.74 cw(c31.34,82.74) 17.47,96.61 95.12,174.26 cw(c122.25,147.12) 122.25,185.5 312.89,185.5 cw(c312.89,181.24) 315.91,184.25 cw(c299.37,167.72) 322.76,167.72 322.76,144.64 cw(c305.11,144.64) 317.59,132.16 cw(c292.14,106.71) 328.13,106.71 328.13,105.91 318.27,105.91 cw(c318.27,140.49) 293.82,116.04 280.74,129.12 ccw(c210.03,58.41) 210.03,158.41 143.62,158.41 ccw(c143.62,104.81) 105.72,142.71 43.61,80.6 ccw(c67.28,56.93) 33.8,56.93 33.8,-68.29 cw(c14.75,-68.29) 28.22,-81.76 18.44,-91.54 cw(c-10.85,-62.26) -10.85,-103.67 -89.77,-103.67 ccw(c-89.77,-105.76) -91.24,-104.28
  region net PWM_WHITE: 213.97,337.92 163.72,337.92 ccw(c163.72,237.92) 93.01,308.63 90.05,305.67 cw(c93.32,308.94) 88.7,308.94 88.7,315.55 cw(c116.1,315.55) 96.72,334.93 115.94,354.15
  region net PWM_WHITE: 316.06,305.81 313.68,308.2 ccw(c242.97,237.49) 242.97,337.49 211.05,337.49 ccw(c211.05,347.54) 218.16,340.43 232.2,354.47 286.97,354.47 cw(c286.97,307.97) 319.85,340.85 cw(c299.71,320.71) 328.19,320.71 328.19,315.38
  region net PWM_WHITE: 316.06,384.45 146.69,384.45 ccw(c146.69,335.46) 112.05,370.1 130.2,351.96 cw(c125.18,346.94) 132.28,346.94 318.85,346.94 cw(c318.85,331.66) 329.65,342.47
  region net PWM_WHITE: -72.42,-70.08 ccw(c-72.42,-39.03) -41.37,-39.03 -41.37,194.8 cw(c11.47,194.8) -25.89,232.16 108.15,366.2 cw(c147.77,326.58) 147.77,382.61 147.77,379.44 cw(c109.03,379.44) 136.42,352.04 -6.42,209.2 ccw(c18.4,184.38) -16.7,184.38 -16.7,-48.06 cw(c-44.69,-48.06) -24.9,-67.85 -39.03,-81.98 cw(c-52.6,-68.4) -52.6,-87.6 -83.31,-87.6 cw(c-83.31,-65.14) -99.19,-81.02
  region net +12V: -102,366
  region net +12V: -102,366
  region net +12V: -107,372
  region net +12V: -289,500
  region net GND: -213,344.74 -213,239 -198,224 -107.85,224 -91,240.85 -91,490 -213,490
  region net +12V: -411,344.74 -411,239 -396,224 -305.85,224 -289,240.85 -289,490 -411,490
  region net +12V: -410,356.73 -410,500
  region: -361.67,18.97
  region net NetC7_1: 287.63,12.5
  region net +3.3V: -217.15,-99.6
  region: 54.64,-316.38
  region net SWDCLK: 169.79,130.76
  region: 176.69,133.7
  region net SWDCLK: 157.07,75.08 124.08,68.59 119.21,76.98 149.77,102.67 163.56,94.83
  region net NetC7_1: 158.92,-198.03
  region net PWM_YELLOW: 140.99,158.28
  region: 5.16,-113.25
  region net PWM_WHITE: -52.72,-63.03
  region net +3.3V: -93.13,513.47
  region net +3.3V: -89.11,516.15
  region: -1032.3,-185.32
  region: 334.81,303.04
  region: 43.46,540.44
  region net +3.3V: -285.49,484.84
  region: -285.53,459.46
  region: 507.27,50.34
Bottom Layer:
  region net +3.3V: -153.03,60.64 -255.56,-41.89 cw(c-295.93,-1.53) -295.93,-58.61 -302.44,-58.61 cw(c-302.44,-29.84) -331.21,-29.84 cw(c-290.65,-29.84) -319.33,-1.16 -269.64,48.54 cw(c-198.93,-22.17) -198.93,77.83 -144.52,77.83
  region net SWDCLK: 234.55,51.69 ccw(c214.52,51.69) 214.52,71.73 213.95,71.73 cw(c219.48,71.73) 219.48,77.25 231.78,77.25 cw(c231.78,66.5) 242.52,66.5 242.52,50.38 cw(c238.42,50.38) 238.42,46.28
  region net SWDCLK: 234.69,54.64 ccw(c217.61,54.64) 217.61,71.72 182.53,71.72 cw(c182.53,102.45) 151.8,102.45 cw(c185.38,102.45) 185.38,136.02 209.09,136.02 213.04,132.07
  region net SWDCLK: 234.72,54.76 234.72,57.91 ccw(c203.4,57.91) 225.54,80.06 224.77,80.84 193.59,80.84 193.59,121.44 200.36,128.22 212.17,128.22 249.94,90.45 249.94,42.44 248.36,40.86 239.39,49.82 239.39,84.62
  region net +3.3V: 72.89,187.17 108.82,223.1 424.59,223.1 465.2,182.5 465.2,-314.15 390.18,-389.16 1.07,-389.16 cw(c1.07,-362.65) -25.44,-362.65 ccw(c-31.16,-362.65) -31.16,-356.93 -35.39,-356.93 ccw(c-35.39,-362.44) -40.9,-362.44 -40.9,-386.27 ccw(c-16.84,-386.27) -16.84,-410.32 408.94,-410.32 500.96,-318.3 500.96,196.24 436.77,260.44 94.72,260.44 41.88,207.6 41.88,181.88
  region net GND: -176.85,163.85 -128.19,163.85 -87.59,204.45 -87.59,213.76 -101.23,227.41 -101.23,348.29 ccw(c-112.12,348.29) -112.12,359.18 -189.19,359.18 ccw(c-189.19,352.27) -196.1,352.27 -196.1,300.89 -249.76,247.22 -249.76,163.41
  region net +12V: -52.11,240.56 -52.11,314.43 ccw(c-128.12,314.43) -74.38,368.18 ccw(c-104.16,338.39) -104.16,380.51 -230.57,380.51 ccw(c-230.57,329.94) -281.14,329.94 -281.14,263.43 cw(c-300.7,263.43) -300.7,243.87 -320.87,243.87 cw(c-320.87,271.26) -348.25,271.26 -348.25,379 cw(c-339.23,379) -339.23,388.02 cw(c-328.99,388.02) -328.99,398.26 -72.88,398.26 cw(c-72.88,347.25) -21.87,347.25 -21.87,245.63
  region net +12V: -334.88,149.62 ccw(c-337.74,149.62) -337.74,152.48 -362.89,152.48 cw(c-362.89,157.1) -367.52,157.1 -367.52,174.83 cw(c-363.13,174.83) -363.13,179.21 -344.66,179.21 cw(c-344.66,169.86) -335.3,169.86
  region net +12V: -431.21,208.17 -431.21,323.34 cw(c-335.71,323.34) -335.71,418.84 cw(c-335.71,401.36) -318.23,401.36 -318.23,262.79 cw(c-378.16,262.79) -378.16,202.86 -394.39,202.86
  region net +12V: 9.14,250.96 9.14,305.31 ccw(c-90.86,305.31) -20.15,376.02 -35.34,391.2 ccw(c-106.05,320.49) -106.05,420.49 -329.11,420.49 ccw(c-329.11,342.06) -407.54,342.06 -407.54,308.9 ccw(c-398.93,308.9) -398.93,300.28 -342.95,320.86 -333.88,389.62 -352.82,344.74 -312.06,344.75 -261.84,380.97 -222.74,391.67 -133.41,391.67 -65.07,376.43 -31.29,320.05 -31.29,242.25
  region net +12V: -304.32,365.16 -386.21,365.16 ccw(c-383.98,341.05) -408.09,338.82 -408.09,317.58 ccw(c-397.78,319.22) -396.13,308.91
  region net +12V: -349.06,365.16 -304.32,365.16 cw(c-304.32,341.91) -281.07,341.91 -281.07,257.12 cw(c-303.61,257.12) -303.61,234.58 -388.05,234.58 cw(c-388.05,254.61) -408.09,254.61 -408.09,336.55 cw(c-379.82,336.55) -379.82,364.81
  region: 222.72,2.27 222.72,-72.81 ccw(c254.93,-72.81) 232.15,-95.59 237.03,-100.46 cw(c211.42,-126.07) 247.63,-126.07 247.63,-127.11 cw(c216.38,-127.11) 216.38,-158.37 213.04,-158.37 cw(c213.04,-126.82) 181.48,-126.82 181.48,-124.38 cw(c216.22,-124.38) 191.66,-99.82 195.89,-95.59 ccw(c167.67,-67.36) 207.59,-67.36 207.59,3.72 cw(c219.46,3.72) 211.07,12.12
  region: 319.32,196.03 419.45,196.03 439.98,175.51 439.98,116.75 421.55,98.32 322.46,98.32 311.92,108.85 311.92,188.54
  region: 319.98,399.97 442.27,399.97 457.26,384.97 457.26,294.93 446.52,284.18 323.07,284.18 312.31,294.93 312.31,390.86 312.31,390.87
  region net DIO: -294.08,-285.05 -272.51,-285.05 -256.86,-300.7 -256.86,-345.45 -276.57,-365.16 -316,-365.16 -334.14,-347.02 -334.14,-300.1 -319.09,-285.05 -294.04,-285.05
  region: -393.78,-284.05 -372.21,-284.05 -356.55,-299.71 -356.55,-344.45 -376.27,-364.17 -415.7,-364.17 -433.84,-346.03 -433.84,-299.1 -418.79,-284.05 -393.74,-284.05
  region net +3.3V: -174.34,118.37 -137.51,118.37 -119.8,136.08 -77.79,136.08 -71,129.29 -75.32,124.96 -100.03,124.96 -161.81,63.19 -165.82,67.2 -196.09,67.2
  region net +3.3V: -153.03,60.64 -94.45,119.22 -59.18,119.22 -59.18,128.08 -56.7,130.57 -64.45,138.33 -96.79,138.32 -164.21,70.9
  region net +3.3V: -61.41,173.77 7.73,173.77 17.97,184.02 37.79,164.2 37.79,151.99 5.06,119.26 -69.77,119.26 -69.77,142.61 -65.28,147.09
  region net 32>52: -142.6,-78.99 -200.88,-78.99 -280.6,-158.71 -320.14,-158.71 -332.04,-146.81 -332.04,-99.78 -319.88,-87.62 -257.75,-87.62 -233.47,-63.33 -142.22,-63.33
  region net 52>32: -144.18,-134 -155.79,-134 -279.95,-258.17 -315.86,-258.17 -329.66,-244.37 -329.66,-201.17 -317.65,-189.17 -263.65,-189.17 -193.07,-118.59 -143.26,-118.59 -143.26,-126.11 -145.16,-128.01
  region net 52>32: -146.37,-132.71
  region net GND: 348.75,54.76 352.62,50.89 352.62,0.62 341.64,-10.36 330.13,1.16 330.13,18.1
  region net GND: 110.54,149.09 134.34,172.9 224.93,172.9 340.33,57.51 333,50.18 333,49 222.89,159.11 141.22,159.11 109.9,127.79
  region net GND: 136.46,123.31 169.9,156.75 142.01,156.75 141.9,156.86 123.78,138.74 123.78,121.8 125.17,120.41
  region net GND: 100.63,87.39 86.74,73.5 62.63,73.5 62.63,74.89 60,77.51 81.49,99 99.53,99
  region net GND: 74.71,113.07 55.25,93.62 -76.41,93.62 -115.15,54.87 -105.13,54.87 -79,81 -78.18,80.18 66.98,80.18 98.01,111.21
  region net GND: -88.52,19.24 -88.52,68.64 -109.29,47.87 -117.58,47.87 -117.58,30.57 -104.57,17.56
  region net GND: -143.45,19.14 -143.45,26.86 -118.87,51.44 -98,51.44 -98,28.72 -88.52,19.24 -94.42,13.34 -94.42,9.7 -128.44,9.7 -129.3,10.56
  region net SWDCLK: 235.55,51.81
  region net SWDCLK: 250.2,54.64 250.2,94.91 213.04,132.07 186.13,132.07 186.13,127.81 173.67,115.35 186.03,102.99 186.03,72.16 233.91,72.16 234.95,73.2
  region: -88.52,19.24
  region: -174.86,-98.68
  region: -174.86,-98.68
  region net GND: -352.87,-50.22 -352.87,-244.13 -369.07,-260.33 -422.86,-260.33 -440.08,-243.1 -440.08,-47.14 -416.71,-23.77 -409.96,-23.77
  region net GND: -352.59,-49.48
  region net GND: -292.76,113.39 -432.94,113.39 -440.08,106.24 -440.08,-47.14 -428.74,-58.49 -361.6,-58.49 -352.59,-49.48 -352.59,1.81 -285.14,69.26 -285.14,110.23 -288.28,113.37
  region net +3.3V: -268.82,-48.32 -156.6,63.91 -156.6,85.56 -208.17,85.56 -300.36,-6.62 -300.36,-38.6
  region net +3.3V: -319.1,-0.92 -231.05,87.12 -231.05,40.04 -284.25,-13.15 -311.78,-13.15 -312.95,-11.98
  region net +3.3V: -302.89,7.74
  region: -158.23,561.05
  region: -280.84,251.09
  region net +12V: -284.98,189.15 -281.07,252.63 -314.46,252.63 -346.64,220.45 -375.58,220.45 -375.58,197.24 -383.22,189.61 -358.78,165.17 -347.18,165.17
  region net +3.3V: 346.57,-314
  region: -301.58,-802.62
  region net 32>52: -297.04,-698.69

## Silkscreen, mask and mechanical layers (free items; w line width, h text height)
Top Overlay:
  text "W" at 175,295 h30 r90
  text "Y" at 175,150 h30 r90
  text "12V" at -384.52,89.5 h30
  text "GND" at -190,90 h30
  text "GND" at -235,10 h30 r270
  text "3.3" at -195,10 h30 r270
  text "GND" at -235,-85 h30 r270
  text "3>5" at -195,-85 h30 r270
  text "GND" at -235,-185 h30 r270
  text "5>3" at -195,-185 h30 r270
  text "CLK" at -235,-285 h30 r270
  text "DIO" at -195,-290 h30 r270